# Altium PCB PCB1.PcbDoc (part 1 of 2)
Units mm, origin at the board's own origin, x right, y up, seen from the top; angles counter-clockwise.
Board outline 127.5 x 103 mm, 2 copper layers (Top Layer, Bottom Layer); 113 components, 82 nets, 373 pads, 162 vias.
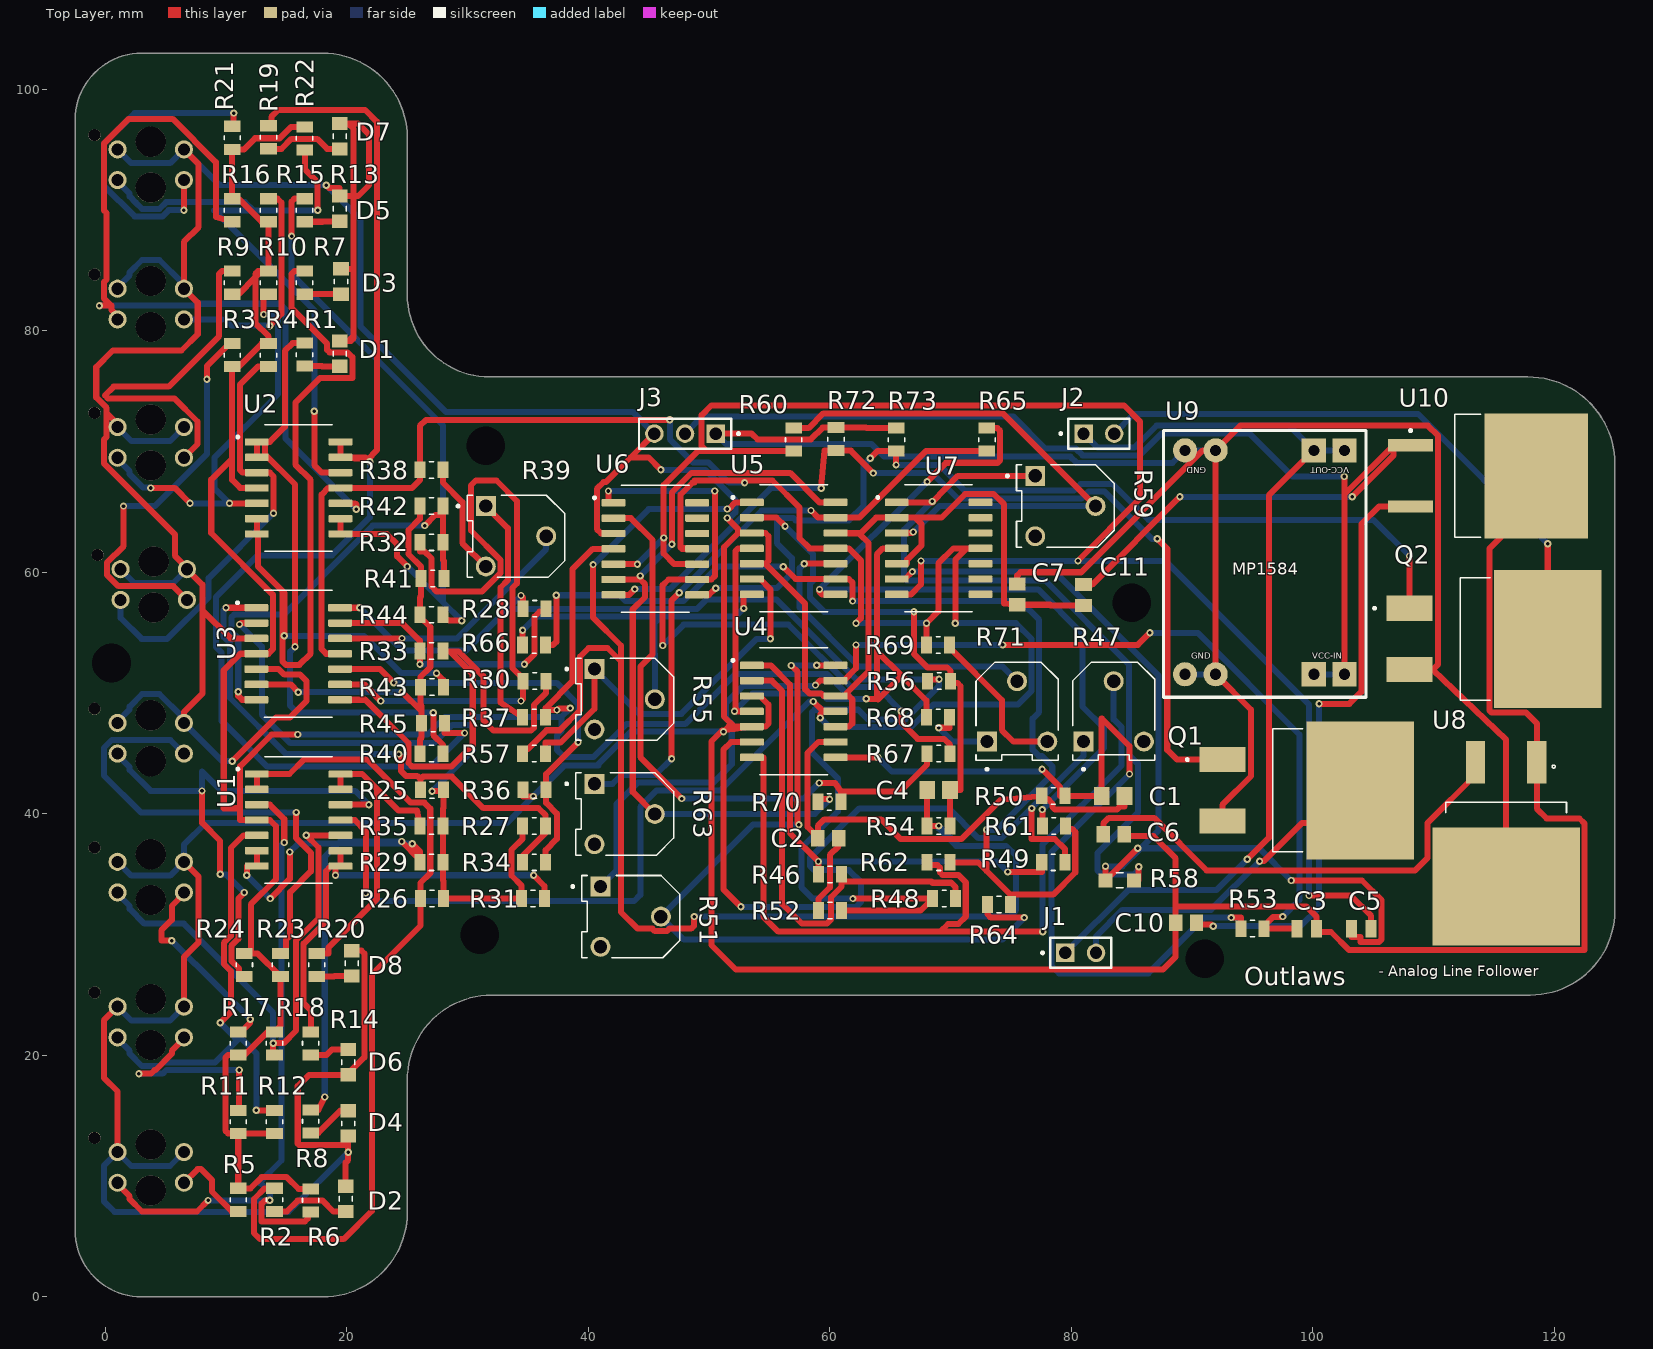
[diagram p0: Top Layer view]
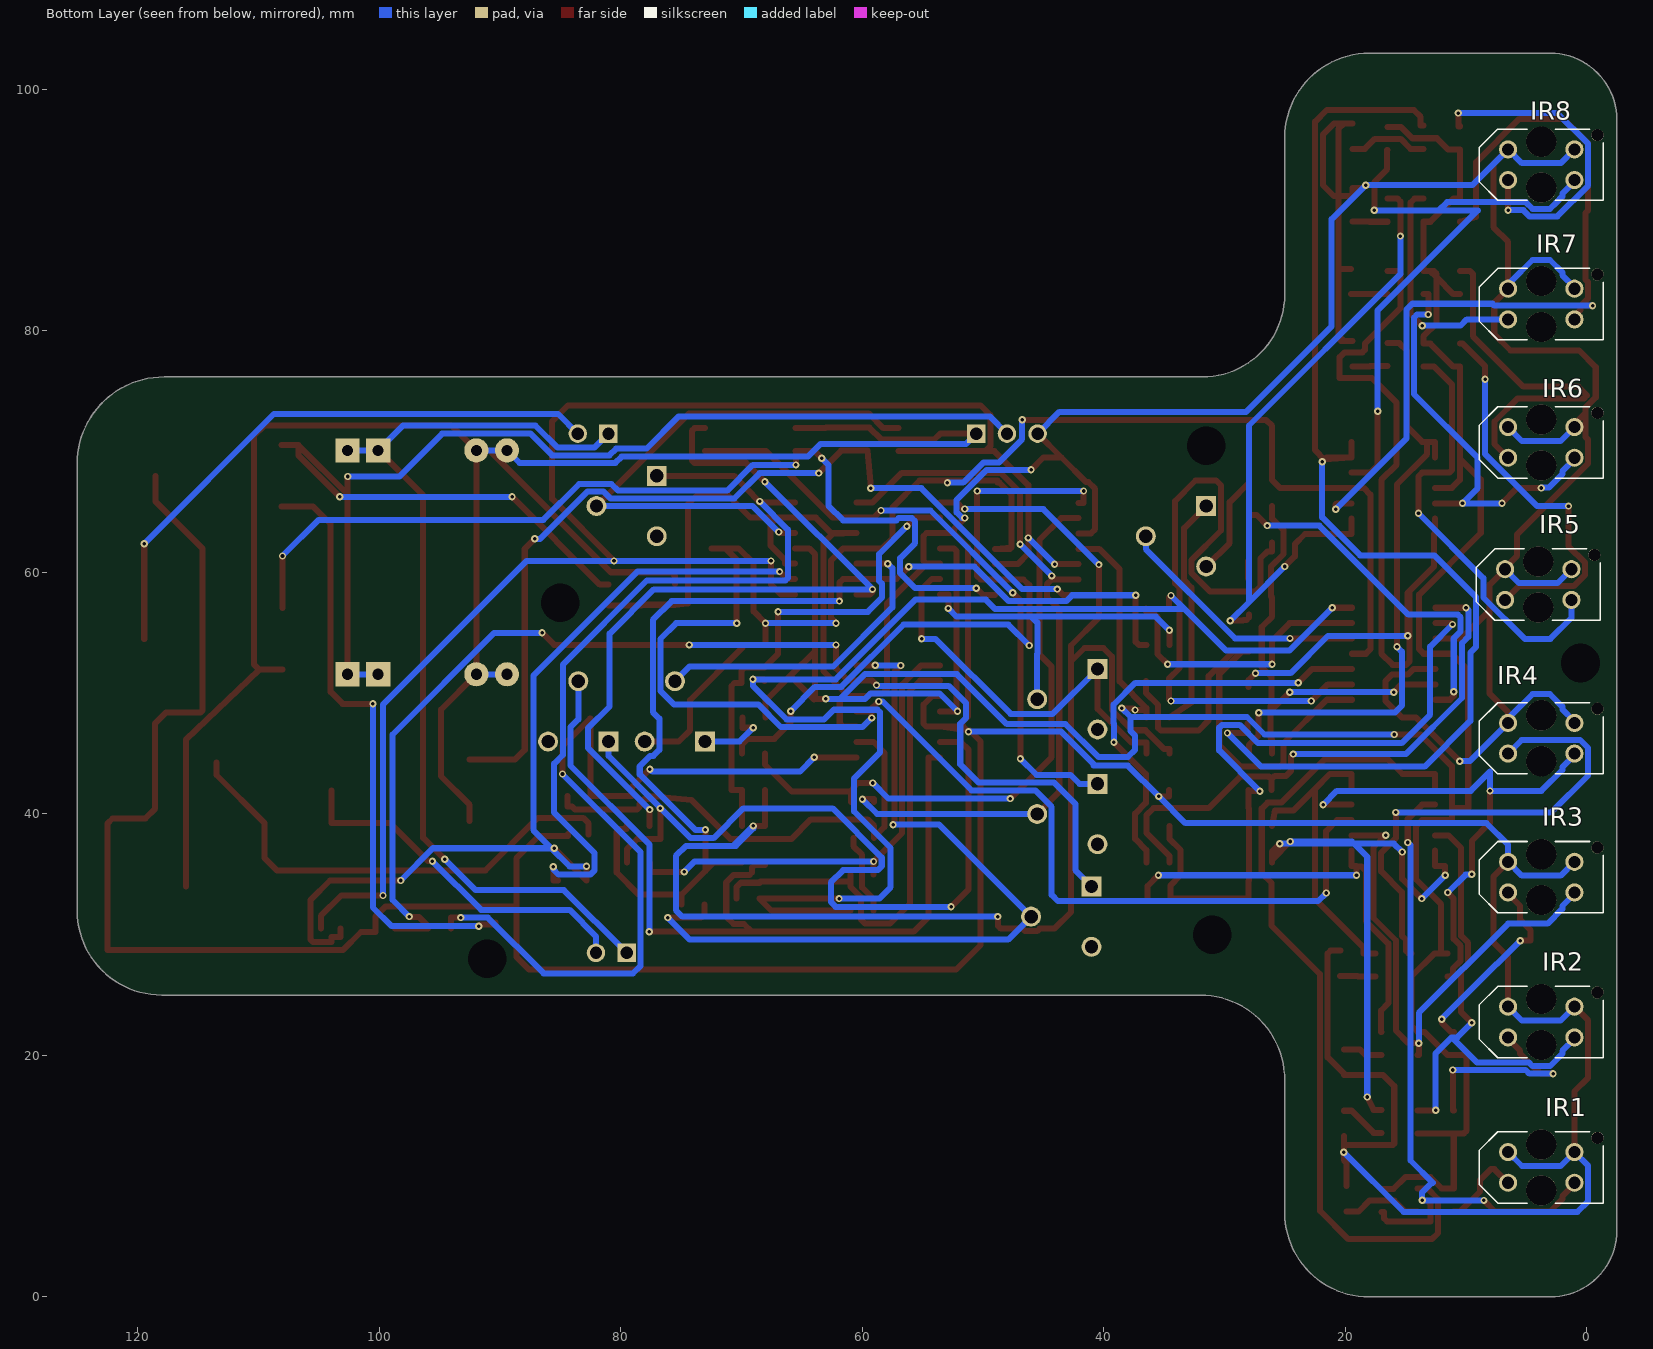
[diagram p1: Bottom Layer view, seen from below]
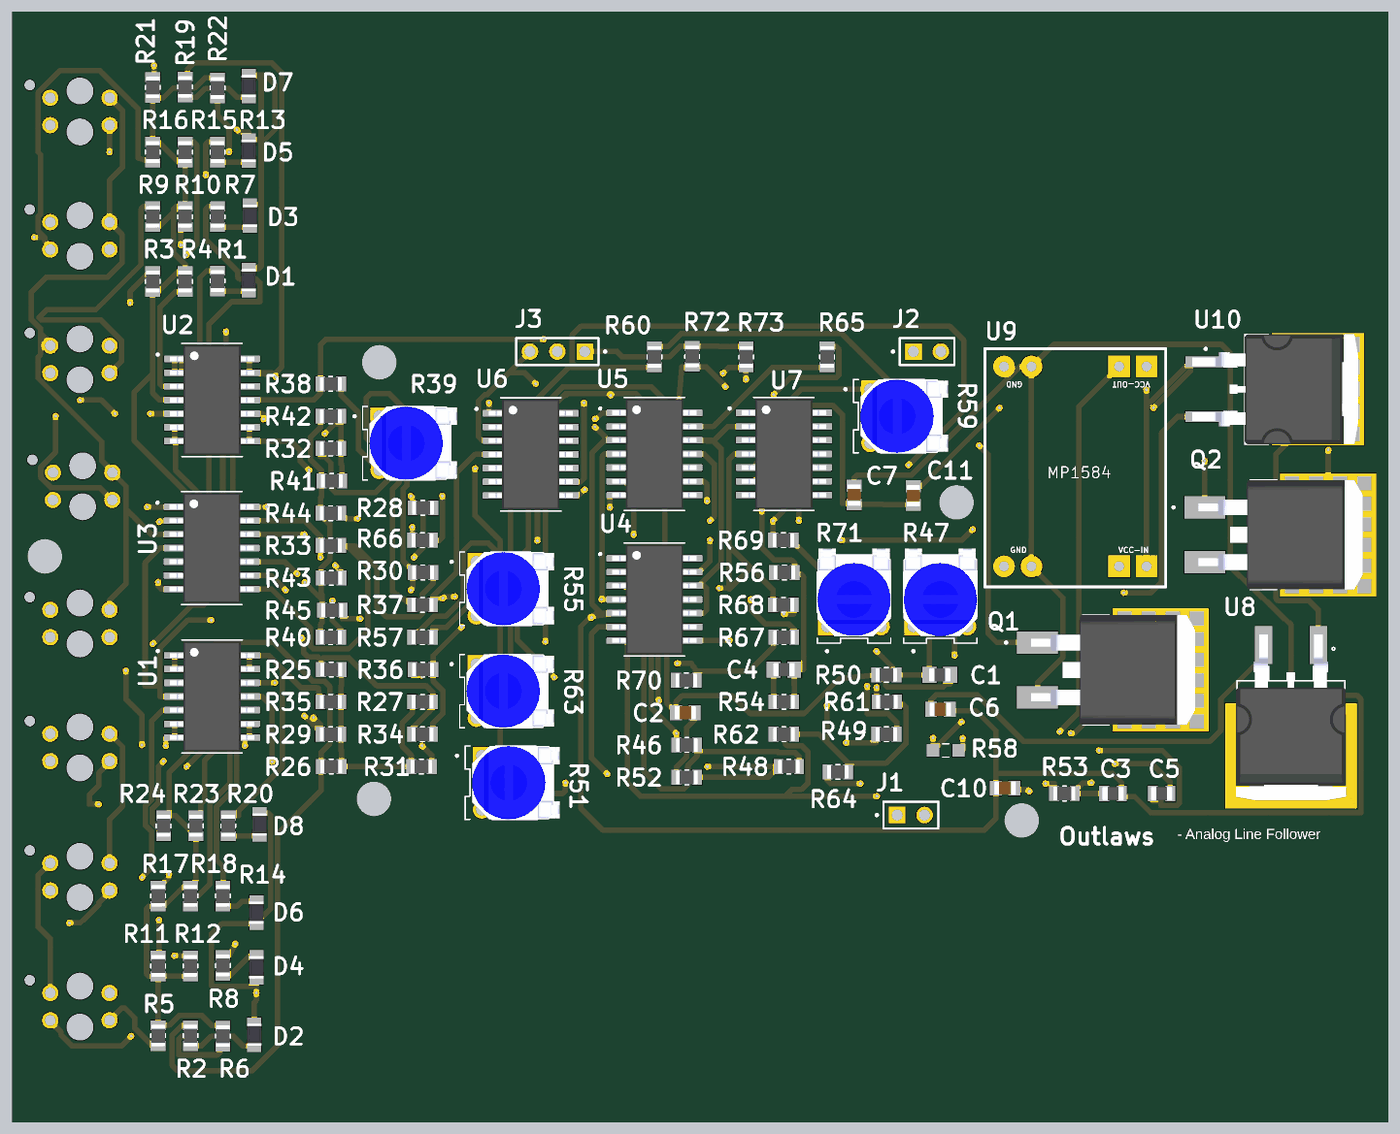
[diagram p3: 3D render of the assembled board from above, using the file's embedded part models]

## Layer stack, top to bottom
Top Solder: solder mask 0.0102, Solder Resist, Dk 3.5
Top Layer: signal copper 0.0356
Dielectric 1: dielectric 0.32, FR-4, Dk 4.8
Bottom Layer: signal copper 0.0356
Bottom Solder: solder mask 0.0102, Solder Resist, Dk 3.5

## Board outline
3,0 18,0 ccw(c18,7) 25,7 25,18 cw(c32,18) 32,25 76.2,25 118,25 ccw(c118,32) 125,32 125,69 ccw(c117.8,69) 117.8,76.2 76.2,76.2 31.8,76.2 cw(c31.8,83) 25,83 25,96 ccw(c18,96) 18,103 12,103 3,103 ccw(c3,97.5) -2.5,97.5 -2.5,5.5 ccw(c3,5.5)

## Design rules (kind name [scope] priority, off if disabled: settings)
BoardOutlineClearance [All] p1: gap=0.2 ignorepadtopadclearanceinfootprint=FALSE
Clearance [All] p1: gap=0.127 ignorepadtopadclearanceinfootprint=FALSE except(0.25: Arc-Hole Track-Hole SMDPad-Hole THPad-Hole Via-Hole Fill-Hole Poly-Hole Region-Hole Text-Hole)
ComponentClearance [All] p1: gap=0.127 collisioncheckmode=3 verticalgap=0.127 showdistances=TRUE
DiffPairsRouting [All] p1: maxlimit=0.254 minlimit=0.127 mostfreqgap=0.127 toplayer_minwidth=0.127 toplayer_maxwidth=25.4 toplayer_prefwidth=0.127 bottomlayer_minwidth=0.127 bottomlayer_maxwidth=25.4 bottomlayer_prefwidth=0.127 maxuncoupledlength=12.7
Height [All] p1: minheight=0 maxheight=1816.048 prefheight=12.7
HoleSize [All] p1: absolutevalues=TRUE maxlimit=6.3 minlimit=0.3 maxpercent=80.000 minpercent=20.000
HoleToHoleClearance [All] p1: gap=0.25 allowstackedmicrovias=FALSE
MinimumAnnularRing [All] p1: minimumring=0.076
MinimumSolderMaskSliver [All] p1: minsoldermaskwidth=0
PlaneClearance [All] p1: clearance=0.127
PlaneConnect PlaneConnectPowerPads [InPadClass('PowerPads')] p1: planeconnectstyle=Direct reliefexpansion=0.508 reliefentries=4 reliefconductorwidth=0.254 reliefairgap=0.254
PlaneConnect [All] p2: pad.planeconnectstyle=Relief pad.reliefexpansion=0.3 pad.reliefentries=4 pad.reliefconductorwidth=0.127 pad.reliefairgap=0.127 via.planeconnectstyle=Direct via.reliefexpansion=0.3 via.reliefentries=4 via.reliefconductorwidth=0.127 via.reliefairgap=0.127
PolygonConnect PolygonConnectPowerPads [All vs (InPadClass('PowerPads'))] p1: connectstyle=Direct reliefconductorwidth=0.254 reliefentries=4 polygonreliefangle="90 Angle" airgapwidth=0.254
PolygonConnect [All] p2: thpad.connectstyle=Relief thpad.reliefconductorwidth=0.127 thpad.reliefentries=4 thpad.polygonreliefangle="90 Angle" thpad.airgapwidth=0.127 smdpad.connectstyle=Relief smdpad.reliefconductorwidth=0.127 smdpad.reliefentries=4 smdpad.polygonreliefangle="90 Angle" smdpad.airgapwidth=0.127 via.connectstyle=Direct via.reliefconductorwidth=0.127 via.reliefentries=4 via.polygonreliefangle="90 Angle" via.airgapwidth=0.127
RoutingVias [All] p1: holewidth=0.3 width=0.6 viastyle="Through Hole" minholewidth=0.3 minwidth=0.6 maxholewidth=0.6 maxwidth=6.6
SilkToSilkClearance [All] p1: silktosilkclearance=0
SilkToSolderMaskClearance [IsPad] p1: minsilkscreentomaskgap=0.127 clearancetoexposedcopper=TRUE
SolderMaskExpansion [All] p1: expansion=0.075 istentingtop=FALSE
SupplyNets "Schematic Supply Nets_2" [InNet('+5')] p1: voltage=0.000
SupplyNets "Schematic Supply Nets_1" [InNet('-5')] p2: voltage=0.000
SupplyNets "Schematic Supply Nets" [InNet('GND')] p3: voltage=0.000
Width [All] p1: maxlimit=25.4 minlimit=0.127 preferedwidth=0.5 minimp=50.000000 maximp=50.000000 favimp=50.000000
20 further rules are at their usual default settings.

## Classes and differential pairs
component class Triangular_Wave: C5 R58 R59 U7
component class Regulators: C6 C7 C10 C11 J3 U8 U9 U10
component class PID: C1 C2 C3 C4 R46 R47 R48 R49 R50 R51 R52 R53 R54 R55 R56 R57 U4 U5
component class Motor_Driver: J1 J2 Q1 Q2 R61 R62 R63 R64 R65 R66 R67 R68 R69 R70 R71 R72 R73 U6
component class Input: D1 D2 D3 D4 D5 D6 D7 D8 IR1 IR2 IR3 IR4 IR5 IR6 IR7 IR8 R1 R2 R3 R4 R5 R6 R7 R8 R9 R10 R11 R12 R13 R14 R15 R16 R17 R18 R19 R20 R21 R22 R23 R24 U1 U2
component class Error_Generator: R25 R26 R27 R28 R29 R30 R31 R32 R33 R34 R35 R36 R37 R38 R39 R40 R41 R42 R43 R44 R45 U3

## Components (designator, comment, footprint, x,y, rotation, side; value= is the part's Value field where it differs from the comment)
C1 "1nF" CAPC2012X70 83.45,41.5 r180 top
C2 "1uF" CAPC2012X135N 59.863,38 r0 top
C3 "10nF" CAPC2013X110N 99.5,30.5 r180 top
C4 "100nF" CAPC2012X70 69,42 r180 top
C5 "10nF" CAPC2013X110N 104,30.5 r0 top
C6 "10uF" CAPC2012X135N 83.5,38.32 r0 top
C7 "1uF" CAPC2012X135N 75.5,58.19 r90 top
C10 "10uF" CAPC2012X135N 89.5,31 r0 top
C11 "1uF" CAPC2012X135N 81,58.137 r90 top
D1 "150080RS75000" 150080RS75000 19.5,78 r90 top
D2 "150080RS75000" 150080RS75000 20,8 r90 top
D3 "150080RS75000" 150080RS75000 19.602,83.968 r90 top
D4 "150080RS75000" 150080RS75000 20,14.5 r270 top
D5 "150080RS75000" 150080RS75000 19.5,90 r90 top
D6 "150080RS75000" 150080RS75000 20,19.577 r270 top
D7 "150080RS75000" 150080RS75000 19.5,96 r90 top
D8 "150080RS75000" 150080RS75000 20.5,27.5 r90 top
IR1 "IR" OPTO_TCRT5000 3.75,10.73 r0 bottom
IR2 "IR" OPTO_TCRT5000 3.75,22.77 r0 bottom
IR3 "IR" OPTO_TCRT5000 3.75,34.77 r0 bottom
IR4 "IR" OPTO_TCRT5000 3.75,46.27 r0 bottom
IR5 "IR" OPTO_TCRT5000 4,59 r0 bottom
IR6 "IR" OPTO_TCRT5000 3.75,70.77 r0 bottom
IR7 "IR" OPTO_TCRT5000 3.75,82.23 r0 bottom
IR8 "IR" OPTO_TCRT5000 3.75,93.77 r0 bottom
J1 "HTSW-102-08-TM-S" SAMTEC_HTSW-102-08-TM-S 80.77,28.5 r180 top
J2 "HTSW-102-08-TM-S" SAMTEC_HTSW-102-08-TM-S 82.27,71.5 r180 top
J3 "External Power Connector" SAMTEC_HTSW-103-XX-X-S 48,71.5 r0 top
Q1 "IRF540NSTRLPBF" TRANS_IRF540NSTRLPBF 99.485,41.96 r0 top
Q2 "IRF540NSTRLPBF" TRANS_IRF540NSTRLPBF 115,54.5 r0 top
R1 "1k" RESC2012X60N#1 16.5,78.045 r90 top
R2 "1k" RESC2012X60N#1 14,8.045 r90 top
R3 "150 ohm" RESC2012X60N#1 10.5,78 r90 top
R4 "10k" RESC2012X60N#1 13.5,78 r90 top
R5 "150 ohm" RESC2012X60N#1 11,8.045 r270 top
R6 "10k" RESC2012X60N#1 17,8 r90 top
R7 "1k" RESC2012X60N#1 16.5,84 r90 top
R8 "1k" RESC2012X60N#1 17,14.545 r90 top
R9 "150 ohm" RESC2012X60N#1 10.5,84 r90 top
R10 "10k" RESC2012X60N#1 13.5,84 r90 top
R11 "150 ohm" RESC2012X60N#1 11,14.5 r90 top
R12 "10k" RESC2012X60N#1 14,14.5 r270 top
R13 "1k" RESC2012X60N#1 16.5,90 r90 top
R14 "1k" RESC2012X60N#1 17,21 r90 top
R15 "150 ohm" RESC2012X60N#1 13.5,90 r90 top
R16 "10k" RESC2012X60N#1 10.5,90 r90 top
R17 "150 ohm" RESC2012X60N#1 11,21 r90 top
R18 "10k" RESC2012X60N#1 14,21 r90 top
R19 "1k" RESC2012X60N#1 13.5,96.045 r90 top
R20 "1k" RESC2012X60N#1 17.5,27.5 r90 top
R21 "150 ohm" RESC2012X60N#1 10.5,96 r90 top
R22 "10k" RESC2012X60N#1 16.5,95.95 r90 top
R23 "150 ohm" RESC2012X60N#1 14.5,27.5 r90 top
R24 "10k" RESC2012X60N#1 11.5,27.5 r90 top
R25 "1k" RESC2012X60N#1 27.045,42 r180 top
R26 "1k" RESC2012X60N#1 27.045,33 r0 top
R27 "1k" RESC2012X60N#1 35.5,39 r0 top
R28 "1k" RESC2012X60N#1 35.545,57 r180 top
R29 "2k" RESC2012X60N#1 27,36 r0 top
R30 "2k" RESC2012X60N#1 35.545,51 r0 top
R31 "4.7k" RESC2012X60N#1 35.405,33 r180 top
R32 "1.5k" RESC2012X60N#2 27,62.5 r180 top
R33 "1k" RESC2012X60N#1 27,53.5 r180 top
R34 "2k" RESC2012X60N#1 35.5,36 r0 top
R35 "10k" RESC2012X60N#1 27,39 r0 top
R36 "1.5k" RESC2012X60N#2 35.545,42 r0 top
R37 "100k" RESC2012X60N#1 35.5,48 r180 top
R38 "100k" RESC2012X60N#1 27,68.5 r180 top
R39 "Preset-10k" TRIM_3306F-1-103 34,63 r180 top
R40 "10k" RESC2012X60N#1 27,45 r180 top
R41 "1k" RESC2012X60N#1 27.095,59.5 r0 top
R42 "1k" RESC2012X60N#1 27,65.5 r0 top
R43 "4.7k" RESC2012X60N#1 27.045,50.5 r180 top
R44 "2k" RESC2012X60N#1 27,56.5 r180 top
R45 "1k" RESC2012X60N#1 27.14,47.5 r180 top
R46 "33k" RESC2012X60N#1 60,35 r180 top
R47 "Preset-10k" TRIM_3306F-1-103 83.5,48.5 r270 top
R48 "33k" RESC2012X60N#1 69.455,33 r0 top
R49 "4.7k" RESC2012X60N#1 78.5,36 r0 top
R50 "33k" RESC2012X60N#1 78.5,41.5 r0 top
R51 "Preset-10k" TRIM_3306F-1-103 43.5,31.5 r180 top
R52 "1k" RESC2012X60N#1 60,32 r180 top
R53 "4.7k" RESC2012X60N#1 95,30.5 r0 top
R54 "100k" RESC2012X60N#1 69,39 r180 top
R55 "Preset-10k" TRIM_3306F-1-103 43,49.5 r180 top
R56 "4.7k" RESC2012X60N#1 69.045,51 r0 top
R57 "4.7k" RESC2012X60N#1 35.5,45 r0 top
R58 "15k" RES_ERA6ARB153V 84,34.5 r180 top
R59 "Preset-10k" TRIM_3306F-1-103 79.5,65.5 r180 top
R60 "47k" RESC2012X60N#1 57,71 r270 top
R61 "47k" RESC2012X60N#1 78.545,39 r180 top
R62 "1k" RESC2012X60N#1 69,36 r0 top
R63 "Preset-10k" TRIM_3306F-1-103 43,40 r180 top
R64 "1k" RESC2012X60N#1 74,32.5 r0 top
R65 "10k" RESC2012X60N#1 73,71 r270 top
R66 "1k" RESC2012X60N#1 35.5,54 r0 top
R67 "47k" RESC2012X60N#1 69,45 r0 top
R68 "100k" RESC2012X60N#1 68.955,48 r0 top
R69 "100k" RESC2012X60N#1 68.955,54 r180 top
R70 "47k" RESC2012X60N#1 59.955,41 r0 top
R71 "Preset-10k" TRIM_3306F-1-103 75.5,48.5 r270 top
R72 "10k" RESC2012X60N#1 60.5,71.045 r90 top
R73 "10k" RESC2012X60N#1 65.5,71 r90 top
U1 "LM324NS" SOIC127P780X200-14N 16,39.5 r0 top
U2 "LM324NS" SOIC127P780X200-14N 16,67 r0 top
U3 "LM324NS" SOIC127P780X200-14N 15.965,53.27 r0 top
U4 "LM324NS" SOIC127P780X200-14N 57,48.5 r0 top
U5 "LM324NS" SOIC127P780X200-14N 57,62 r0 top
U6 "LM324NS" SOIC127P780X200-14N 45.535,61.96 r0 top
U7 "LM324NS" SOIC127P780X200-14N 69,62 r0 top
U8 "-5 regulator" VREG_L7805ACD2T 116,37.575 r270 top
U9 "MP1584" MP1584 95.5,63 r0 top
U10 "+5 regulator" TO254P1542X460-3N 114.5,68 r0 top

## Footprints (in the part's own frame and the unit in brackets; to place one, negate y for a bottom-side part, rotate by r counter-clockwise, add the part's x,y. Pads: shape width x height; smd on the part's side, far side on the other; paste and mask are expansions set on the pad)
150080RS75000 [mm]
  rect 1.1x1.3 smd: 1(-0.923,0.102) 2(1.177,0.102)
  silkscreen extent -0.07,-0.45 0.33,0.65, body extent -0.92,-0.57 1.18,0.78, height 0.8
CAPC2012X70 [mm]
  rect 1.3x1.5 smd paste+0 mask+0.102: 1(-0.95,0) 2(0.95,0)
  body extent -1,-0.63 1,0.63, height 0.7
CAPC2012X135N [mm]
  rect 1.1x1.38 smd: 1(-0.863,0) 2(0.863,0)
  body extent -1,-0.63 1,0.63, height 1.4
CAPC2013X110N [mil]
  rect 36x57 smd: 1(-32,0) 2(32,0)
  body extent -39,-25 39,25, height 28
MP1584 [mil]
  round 78.74 hole 36 paste-99999 mask+2: GNDin(-240,-450) GNDout(-240,280)
  round 78.74 hole 36 paste-99999 mask+4: GNDin(-140,-450) GNDout(-140,280)
  rect 78.74x78.74 hole 36 paste-99999 mask+4: Vin(180,-450) Vout(180,280)
  rect 78.74x78.74 hole 36 paste-99999 mask+2: Vin(280,-450) Vout(280,280)
  silkscreen extent -310,-525 350,345
OPTO_TCRT5000 [mm]
  round 1.5 hole 1: A(2.75,1.27) CATH(2.75,-1.27) COLL(-2.75,1.27) E(-2.75,-1.27)
  round 1 hole 1 unplated: ""(-4.65,-2.45)
  round 2.5 hole 2.5 unplated: ""(0,-1.9) ""(0,1.9)
  silkscreen extent -5.15,-2.95 5.15,2.95
RES_ERA6ARB153V [mm]
  rect 1.15x1.15 smd: 1(-1.175,0) 2(1.175,0)
  silkscreen extent -0.28,-0.62 0.28,0.63
RESC2012X60N#1 [mm]
  rect 0.92x1.38 smd: 1(-0.955,0) 2(0.955,0)
  silkscreen extent -0.17,-0.68 0.17,0.68, body extent -1,-0.63 1,0.63, height 0.6
RESC2012X60N#2 [mm]
  rect 0.92x1.38 smd paste+0 mask+0.102: 1(-0.955,0) 2(0.955,0)
  silkscreen extent -0.17,-0.68 0.17,0.68, body extent -1,-0.63 1,0.63, height 0.6
SAMTEC_HTSW-102-08-TM-S [mm]
  rect 1.53x1.53 hole 1.02: 01(1.27,0)
  round 1.53 hole 1.02: 02(-1.27,0)
  silkscreen extent -2.54,-1.24 3.26,1.24
SAMTEC_HTSW-103-XX-X-S [mm]
  rect 1.53x1.53 / inner round 1.53 / far side rect 1.53x1.53 hole 1.02: 01(2.54,0)
  round 1.53 hole 1.02: 02(0,0) 03(-2.54,0)
  silkscreen extent -3.81,-1.24 4.53,1.24
SOIC127P780X200-14N [mm]
  rrect25% 1.97x0.61 smd: 1(-3.465,3.81) 2(-3.465,2.54) 3(-3.465,1.27) 4(-3.465,0) 5(-3.465,-1.27) 6(-3.465,-2.54) 7(-3.465,-3.81) 8(3.465,-3.81) 9(3.465,-2.54) 10(3.465,-1.27) 11(3.465,0) 12(3.465,1.27) 13(3.465,2.54) 14(3.465,3.81)
  silkscreen extent -5.13,-5.25 2.8,5.25, body extent -3.9,-5.1 3.9,5.1, height 2
TO254P1542X460-3N [mm]
  rect 3.74x1.02 smd: 1(-6.41,2.54) 2(-6.41,-2.54)
  rect 8.56x10.37 smd paste-6: 3(4,0)
  silkscreen extent -6.51,-5.1 -0.59,5.1, body extent -7.71,-5.1 7.71,5.1, height 4.6
TRANS_IRF540NSTRLPBF [mm]
  rect 3.81x2.08 smd: 1(-6.985,2.54) 3(-6.985,-2.54)
  rect 8.89x11.43 smd paste-7: 2(4.445,0)
  silkscreen extent -9.99,-5.08 -0.32,5.08, body extent -7.62,-5.08 7.62,5.08, height 4.83
TRIM_3306F-1-103 [mm]
  rect 1.65x1.65 / inner round 1.65 / far side rect 1.65x1.65 hole 1.1: 1(2.5,-2.5)
  round 1.65 hole 1.1: 2(-2.5,0) 3(2.5,2.5)
  silkscreen extent -4.05,-3.41 4.9,3.4, body extent -4.7,-3.4 3.4,3.4, height 8.38
VREG_L7805ACD2T [mm]
  rect 3.5x1.6 smd: 1(-6.7,2.54) 3(-6.7,-2.54)
  rect 9.75x12.2 smd paste-7: 4(3.575,0)
  silkscreen extent -6.48,-5 -2.51,5, body extent -7.71,-5.1 7.71,5.1, height 4.6

## Part data
C1: "1000 pF Â±10% 50V Ceramic Capacitor X7R 0805 (2012 Metric); CC0805KRX7R9BB102", Package="0805 Yageo", Check_prices=https://www.snapeda.com/parts/CC0805KRX7R9BB102/Yageo/view-part/?ref=eda, MF=Yageo, MP=CC0805KRX7R9BB102, SnapEDA_Link=https://www.snapeda.com/parts/CC0805KRX7R9BB102/Yageo/view-part/?ref=snap
C2 C7 C11: "SMD Capacitor X7R(EIA) with Capacitance: 1.0uF Tol. 10%. Rated Voltage: 25Vdc; GRM21BR71E105KA99L", Package="2012 Murata", Check_prices=https://www.snapeda.com/parts/GRM21BR71E105KA99L/Murata/view-part/?ref=eda, MF=Murata, MP=GRM21BR71E105KA99L, SnapEDA_Link=https://www.snapeda.com/parts/GRM21BR71E105KA99L/Murata/view-part/?ref=snap
C3 C5: "10000 pF Â±10% 50V Ceramic Capacitor X7R 0805 (2012 Metric); CC0805KRX7R9BB103", Package="0805 Yageo", Check_prices=https://www.snapeda.com/parts/CC0805KRX7R9BB103/Yageo/view-part/?ref=eda, MF=Yageo, MP=CC0805KRX7R9BB103, SnapEDA_Link=https://www.snapeda.com/parts/CC0805KRX7R9BB103/Yageo/view-part/?ref=snap
C4: library part 1nF, "1000 pF Â±10% 50V Ceramic Capacitor X7R 0805 (2012 Metric); CC0805KRX7R9BB102", Package="0805 Yageo", Check_prices=https://www.snapeda.com/parts/CC0805KRX7R9BB102/Yageo/view-part/?ref=eda, MF=Yageo, MP=CC0805KRX7R9BB102, SnapEDA_Link=https://www.snapeda.com/parts/CC0805KRX7R9BB102/Yageo/view-part/?ref=snap
C6 C10: library part 1uF, "SMD Capacitor X7R(EIA) with Capacitance: 1.0uF Tol. 10%. Rated Voltage: 25Vdc; GRM21BR71E105KA99L", Package="2012 Murata", Check_prices=https://www.snapeda.com/parts/GRM21BR71E105KA99L/Murata/view-part/?ref=eda, MF=Murata, MP=GRM21BR71E105KA99L, SnapEDA_Link=https://www.snapeda.com/parts/GRM21BR71E105KA99L/Murata/view-part/?ref=snap
IR1 IR2 IR3 IR4 IR5 IR6 IR7 IR8: "950 nm 60 mA Through Hole Reflective Optical Sensor with Transistor Output; TCRT5000", Package=None, Availability=Unavailable, MP=TCRT5000, Price=None
J1 J2: "HEADER, 2 CONTACTS, 1 ROW, THROUGH HOLE, 2.54 MM; Connector Systems:Board-to-Board; Pitch Spacing:2.54mm; No. of Rows:1Rows; No. of Contacts:2Contacts; Contact Termination Type:Through Hole; Product Range:HTSW Series; Gender:Header RoHS Compliant: Yes", Package=None, Availability="In Stock", Check_prices=https://www.snapeda.com/parts/HTSW10208TMS/Samtec/view-part/?ref=eda, MF=Samtec, MP=HTSW10208TMS, Price=None, SnapEDA_Link=https://www.snapeda.com/parts/HTSW10208TMS/Samtec/view-part/?ref=snap
J3: library part HTSW-103-XX-X-S, "HTSW-103-XX-X-S", Package=None, Availability=Unavailable, MF=Samtec, MP=HTSW-103-XX-X-S, Price=None
Q1 Q2: "MOSFET, Power,N-Ch,VDSS 100V,RDS(ON) 44 Milliohms,ID 33A,D2Pak,PD 130W,VGS+/-20V", Package="D2PAK Infineon", Check_prices=https://www.snapeda.com/parts/IRF540NSTRLPBF/Infineon/view-part/?ref=eda, MF=Infineon, MP=IRF540NSTRLPBF, SnapEDA_Link=https://www.snapeda.com/parts/IRF540NSTRLPBF/Infineon/view-part/?ref=snap
R1 R2 R7 R8 R13 R14 R19 R20 R25 R26 R27 R28 R33 R41 R42 R45 R52 R62 R64 R66: "1 kOhms Â±1% 0.125W, 1/8W Chip Resistor 0805 (2012 Metric) Moisture Resistant Thick Film; RC0805FR-071KL", Package="2012 Yageo", Check_prices=https://www.snapeda.com/parts/RC0805FR-071KL/Yageo/view-part/?ref=eda, DigiKey_Part_Number=311-1.00KCRTR-ND, MF=Yageo, MP=RC0805FR-071KL, Purchase-URL=https://pricing.snapeda.com/search?q=RC0805FR-071KL&ref=eda, SnapEDA_Link=https://www.snapeda.com/parts/RC0805FR-071KL/Yageo/view-part/?ref=snap
R3 R5 R9 R11 R15 R17 R21 R23: "150 Ohms Â±1% 0.125W, 1/8W Chip Resistor 0805 (2012 Metric) Moisture Resistant Thick Film; RC0805FR-07150RL", Package="2012 Yageo", Check_prices=https://www.snapeda.com/parts/RC0805FR-07150RL/Yageo/view-part/?ref=eda, MF=Yageo, MP=RC0805FR-07150RL, SnapEDA_Link=https://www.snapeda.com/parts/RC0805FR-07150RL/Yageo/view-part/?ref=snap
R4 R6 R10 R12 R16 R18 R22 R24 R35 R40 R65 R72 R73: "10 kOhms Â±1% 0.125W, 1/8W Chip Resistor 0805 (2012 Metric) Moisture Resistant Thick Film; RC0805FR-0710KL", Package="2012 Rohm Semiconductor", Availability="In Stock", Check_prices=https://www.snapeda.com/parts/RC0805FR-0710KL/Yageo/view-part/?ref=eda, MF=Yageo, MP=RC0805FR-0710KL, Price=None, Purchase-URL=https://pricing.snapeda.com/search/part/RC0805FR-0710KL/?ref=eda, SnapEDA_Link=https://www.snapeda.com/parts/RC0805FR-0710KL/Yageo/view-part/?ref=snap
R29 R30 R34 R44: "2 kOhms Â±1% 0.125W, 1/8W Chip Resistor 0805 (2012 Metric) Moisture Resistant Thick Film; RC0805FR-072KL", Package="2012 Yageo", Check_prices=https://www.snapeda.com/parts/RC0805FR-072KL/Yageo/view-part/?ref=eda, MF=Yageo, MP=RC0805FR-072KL, SnapEDA_Link=https://www.snapeda.com/parts/RC0805FR-072KL/Yageo/view-part/?ref=snap
R31 R43 R49 R53 R56 R57: "4.7 kOhms Â±1% 0.125W, 1/8W Chip Resistor 0805 (2012 Metric) Moisture Resistant Thick Film; RC0805FR-074K7L", Package="2012 Rohm Semiconductor", Availability="In Stock", Check_prices=https://www.snapeda.com/parts/RC0805FR-074K7L/Yageo/view-part/?ref=eda, MF=Yageo, MP=RC0805FR-074K7L, Price=None, Purchase-URL=https://pricing.snapeda.com/search/part/RC0805FR-074K7L/?ref=eda, SnapEDA_Link=https://www.snapeda.com/parts/RC0805FR-074K7L/Yageo/view-part/?ref=snap
R32 R36: "Res Thin Film 0805 1.5K Ohm 0.1% 0.125W(1/8W) Â±25ppm/C Epoxy Pad SMD T/R; RT0805BRD071K5L", Package="2012 Yageo", Check_prices=https://www.snapeda.com/parts/RT0805BRD071K5L/Yageo/view-part/?ref=eda, MF=Yageo, MP=RT0805BRD071K5L, SnapEDA_Link=https://www.snapeda.com/parts/RT0805BRD071K5L/Yageo/view-part/?ref=snap
R37 R38 R54 R68 R69: "100 kOhms Â±1% 0.125W, 1/8W Chip Resistor 0805 (2012 Metric) Moisture Resistant Thick Film; RC0805FR-07100KL", Package="2012 Yageo", Check_prices=https://www.snapeda.com/parts/RC0805FR-07100KL/Yageo/view-part/?ref=eda, MF=Yageo, MP=RC0805FR-07100KL, SnapEDA_Link=https://www.snapeda.com/parts/RC0805FR-07100KL/Yageo/view-part/?ref=snap
R39 R47 R51 R55 R59 R63 R71: library part Preset, "TRIMMER - 6MM ROUND, SINGLE-TURN,CERMET, 10K OHMS", Package="3306F Bourns", Check_prices=https://www.snapeda.com/parts/3306F-1-103/Bourns/view-part/?ref=eda, MF=Bourns, MP=3306F-1-103, SnapEDA_Link=https://www.snapeda.com/parts/3306F-1-103/Bourns/view-part/?ref=snap
R46 R48 R50: "33 kOhms Â±1% 0.125W, 1/8W Chip Resistor 0805 (2012 Metric) Moisture Resistant Thick Film; RC0805FR-0733KL", Package="2012 Yageo", Check_prices=https://www.snapeda.com/parts/RC0805FR-0733KL/Yageo/view-part/?ref=eda, MF=Yageo, MP=RC0805FR-0733KL, SnapEDA_Link=https://www.snapeda.com/parts/RC0805FR-0733KL/Yageo/view-part/?ref=snap
R58: "ERA6ARB153V", Package=None, Availability=Unavailable, MP=ERA6ARB153V, Price=None
R60 R61 R67 R70: "47 kOhms Â±1% 0.125W, 1/8W Chip Resistor 0805 (2012 Metric) Moisture Resistant Thick Film; RC0805FR-0747KL", Package="2012 Yageo", Check_prices=https://www.snapeda.com/parts/RC0805FR-0747KL/Yageo/view-part/?ref=eda, MF=Yageo, MP=RC0805FR-0747KL, SnapEDA_Link=https://www.snapeda.com/parts/RC0805FR-0747KL/Yageo/view-part/?ref=snap
U1 U2 U3 U4 U5 U6 U7: "4-Channel industry standard operational amplifier 14-SO 0 to 70; LM324NSRG4", Package="SOP-14 Texas Instruments", Availability="In Stock", Check_prices=https://www.snapeda.com/parts/LM324NSRG4/Texas+Instruments/view-part/?ref=eda, MF="Texas Instruments", MP=LM324NSRG4, Price=None, Purchase-URL=https://pricing.snapeda.com/search/part/LM324NSRG4/?ref=eda, SnapEDA_Link=https://www.snapeda.com/parts/LM324NSRG4/Texas+Instruments/view-part/?ref=snap
U8: "Linear Voltage Regulator IC Negative Fixed 1 Output 1.5A D2PAK; L7905CD2T-TR", Package="TO-263-3 STMicroelectronics", Check_prices=https://www.snapeda.com/parts/L7905CD2T-TR/STMicroelectronics/view-part/?ref=eda, MF=STMicroelectronics, MP=L7905CD2T-TR, SnapEDA_Link=https://www.snapeda.com/parts/L7905CD2T-TR/STMicroelectronics/view-part/?ref=snap
U10: "Linear Voltage Regulator IC Positive Fixed 1 Output 1.5A D2PAK; L7805CD2T-TR", Package="TO-263-3 STMicroelectronics", Check_prices=https://www.snapeda.com/parts/L7805CD2T-TR/STMicroelectronics/view-part/?ref=eda, MF=STMicroelectronics, MP=L7805CD2T-TR, SnapEDA_Link=https://www.snapeda.com/parts/L7805CD2T-TR/STMicroelectronics/view-part/?ref=snap

## Free pads (board coordinates)
  round 1.524 hole 3.2 unplated: 2(31,30) 2(91.045,28) 3(85,57.5) 4(0.5,52.5) MH2(31.5,70.5)

## Via types
v1: diameter 0.6, hole 0.3, Top Layer to Bottom Layer, 162 vias

## Nets (pads, with @x,y where several pads share a name; then routed paths per layer and width w, separated by ;. In a path a pad name is that pad's centre, name@x,y a point inside that pad or via, vN(x,y) a via of type N, cw(c..) or ccw(c..) an arc to the next point about the centre after c; other vN are vias at no path point)
6V: J1.01 J2.01 U9.Vout | length 78.1
  Top Layer w0.5: v1(94.564,36.246) 96.342,38.024 96.342,66.382 U9.Vout@100.072,70.112
  Bottom Layer w0.5: J1.01@79.5,28.5 84.688,33.688 92.007,33.688 v1(94.564,36.246) ; J2.01@81,71.5 82.167,70.333 85.217,70.333 87.046,72.161 98.023,72.161 U9.Vout@100.072,70.112 U9.Vout@102.612,70.112
+5: C10.2 U10.2 | length 50.3
  Top Layer w0.5: C10.2@90.363,31 90.363,30.861 91.592,30.861 v1(91.745,30.709) ; v1(100.508,49.124) 103.022,49.124 104.013,50.114 104.013,64.012 105.461,65.46 U10.2@108.09,65.46
  Bottom Layer w0.5: v1(91.745,30.709) 98.958,30.709 100.508,32.258 v1(100.508,49.124)
+5V: R3.1 R4.2 R5.1 R6.2 R9.1 R10.2 R11.1 R12.2 R15.1 R16.2 R17.1 R18.2 R21.1 R22.2 R23.1 R24.2 R37.1 R68.1 U1.4 U2.4 U3.4 U4.4 U5.4 U6.4 U7.4 | length 267.8
  Top Layer w0.5: R9.1@10.5,83.045 11.024,83.045 12.421,84.442 ; R24.2@11.5,28.455 R24.2@12.04,28.455 ; U2.4@12.535,67 11.156,67 10.49,67.666 10.49,69.418 ; R12.2@14,13.545 R11.1@11,13.545 ; v1(15.926,46.584) 13.767,46.584 11.151,43.967 11.151,40.473 ; R22.2@16.5,96.905 15.371,96.905 14.427,95.961 12.395,95.961 11.479,95.045 R21.1@10.5,95.045 R16.2@10.5,90.955 11.024,90.955 12.934,89.045 R15.1@13.5,89.045 R10.2@13.5,84.955 R10.2@12.934,84.955 ; R6.2@17,8.955 15.988,8.955 15.011,9.931 12.946,9.931 12.014,9 R5.1@11,9 R11.1@11,13.545 ; R37.1@36.455,48 R37.1@36.455,48.616 ; v1(38.5,48.768) 38.481,48.749 37.549,48.749 37.416,48.616 R37.1@36.455,48.616 ; U6.4@42.07,61.96 40.361,61.96 38.671,60.27 38.671,50.984 36.455,48.768 R37.1@36.455,48.616 ; v1(52.095,48.5) 52.426,48.5 ; U4.4@53.535,48.5 52.426,48.5 ; U5.4@53.535,62 52.399,62 52.172,61.773 52.172,48.754 52.426,48.5 ; v1(63,49.539) 63.89,49.539 63.89,53.487 ; 63.966,49.463 65.941,51.437 ; U7.4@65.535,62 64.388,62 63.89,61.503 63.89,53.487 ; R68.1@68,48 68,49.378 65.941,51.437 ; 10.49,69.418 8.763,67.691 8.763,63.271 13.868,58.166 13.868,53.651 13.487,53.27 U3.4@12.5,53.27 11.176,53.27 9.797,51.891 9.797,40.473 11.151,40.473 ; 10.49,69.418 10.49,77.045 R3.1@10.5,77.045 11.024,77.045 12.934,78.955 R4.2@13.5,78.955 13.513,78.955 13.513,79.553 12.421,80.645 12.421,84.442 ; R11.1@11,13.545 10.16,13.545 9.931,13.774 9.931,19.816 10.16,20.045 R17.1@11,20.045 11.532,20.045 13.442,21.955 R18.2@14,21.955 14.5,22.455 R23.1@14.5,26.545 14.496,26.545 12.586,28.455 R24.2@12.04,28.455 ; 11.151,40.473 11.151,39.5 U1.4@12.535,39.5 13.614,39.5 14.122,38.992 14.122,34.595 12.04,32.512 R24.2@12.04,28.455 ; 12.421,84.442 12.421,84.734 12.641,84.955 R10.2@12.934,84.955 ; 12.421,84.442 R10.2@12.934,84.955 ; 63.89,53.487 65.941,51.437
  Bottom Layer w0.5: v1(15.926,46.584) 26.67,46.584 28.118,48.031 37.763,48.031 ; v1(38.5,48.768) 37.763,48.031 ; v1(52.095,48.5) 53.585,49.99 59.295,49.99 59.746,49.539 61.817,49.539 ; v1(63,49.539) 61.817,49.539 ; 37.763,48.031 37.763,46.86 37.389,46.485 37.389,45.314 37.973,44.729 40.437,44.729 43.155,47.447 48.006,47.447 52.146,51.587 59.768,51.587 61.817,49.539
  other v1: 37.389,48.616
+7.4V: C11.2 J3.02 U9.Vin U10.1 | length 115.8
  Top Layer w0.5: C11.2@81,59 81.714,59 v1(88.982,66.269) ; v1(102.591,67.945) 102.612,67.924 102.612,66.468 ; U9.Vin@102.612,51.57 102.612,66.468 ; v1(103.251,66.269) 106.68,69.698 U10.1@106.684,70.54 ; U10.1@108.09,70.54 U10.1@106.684,70.54 ; 102.612,66.468 U10.1@106.684,70.54
  Bottom Layer w0.5: J3.02@48,71.5 49.423,72.923 75.184,72.923 77.851,70.256 80.374,70.256 80.924,69.706 85.657,69.706 87.452,71.501 94.767,71.501 98.323,67.945 v1(102.591,67.945) ; v1(88.982,66.269) v1(103.251,66.269) ; U9.Vin@100.072,51.57 U9.Vin@102.612,51.57
-5: C6.1 U8.3 | length 39.7
  Top Layer w0.5: C6.1@82.637,38.32 82.637,39.218 83.094,39.675 86.843,39.675 91.186,35.331 108.458,35.331 109.499,36.373 109.499,39.268 113.46,43.229 U8.3@113.46,44.275
-5V: R38.2 R69.2 U1.11 U2.11 U3.11 U4.11 U5.11 U6.11 U7.11 | length 203.2
  Top Layer w0.5: U3.11@19.43,53.27 18.282,53.27 17.907,53.645 17.907,66.446 18.461,67 U2.11@19.465,67 25.4,67 26.045,67.645 R38.2@26.045,68.5 26.045,72.136 26.553,72.644 v1(46.736,72.644) ; U1.11@19.465,39.5 20.65,39.5 21.565,38.586 v1(21.565,33.452) ; v1(52.934,67.437) v1@52.934,67.616 ; v1(58.618,49.313) 59.431,48.5 ; v1(59.207,47.955) 59.207,48.277 59.431,48.5 ; U4.11@60.465,48.5 59.431,48.5 ; v1(62.154,55.804) 62.56,56.21 62.56,61.009 61.57,62 U5.11@60.465,62 58.318,62 57.462,62.856 57.462,65.398 55.244,67.616 v1@52.934,67.616 ; R69.2@68,54 v1(68,55.804) 68.986,56.79 68.986,60.757 70.23,62 71.323,62 ; v1(70.383,55.804) 70.383,61.06 71.323,62 ; U7.11@72.465,62 71.323,62 ; 47.625,62.087 47.752,61.96 U6.11@49,61.96 47.625,62.087 ; 47.625,62.087 47.625,66.446 48.616,67.437 ; 48.616,67.437 48.795,67.437 48.795,67.616 ; 48.616,67.437 48.795,67.616 ; 48.795,67.616 v1@52.934,67.616
  Bottom Layer w0.5: v1(21.565,33.452) 22.225,32.791 43.79,32.791 44.298,33.3 44.298,40.593 45.657,41.952 50.934,41.952 58.295,49.313 v1(58.618,49.313) ; v1(46.736,72.644) 46.736,71.044 48.653,69.127 49.938,69.127 51.628,67.437 v1(52.934,67.437) ; v1(59.207,47.955) 59.969,47.193 66.711,47.193 68.591,49.073 75.584,49.073 76.702,50.19 76.702,54.489 75.387,55.804 v1(70.383,55.804) ; v1(62.154,55.804) v1(68,55.804)
-7.4V: C7.2 J3.01 Q1.3 Q2.3 R72.2 R73.2 U8.4 U9.GNDin U9.GNDout | length 176.9
  Top Layer w0.5: J3.01@50.54,71.5 53.519,71.5 54,71.018 58.409,71.018 59.391,72 R72.2@60.5,72 62.967,72 63.012,71.955 R73.2@65.5,71.955 ; C7.2@75.5,59.053 75.5,59.741 75.779,60.02 80.797,60.02 90.889,70.112 U9.GNDout@91.944,70.112 ; Q1.3@92.5,39.42 92.5,40.76 94.869,43.129 94.869,48.645 U9.GNDin@91.944,51.57 U9.GNDout@91.944,70.112 ; Q2.3@108.015,51.96 109.931,51.96 ; U8.4@116,34 116.002,34 116.002,46.152 109.931,51.96 ; U9.GNDout@91.944,70.112 93.993,72.161 109.525,72.161 110.363,71.323 110.363,52.392 109.931,51.96
  Bottom Layer w0.5: J3.01@50.54,71.5 51.385,70.655 63.432,70.655 64.499,69.588 79.917,69.588 80.426,69.079 88.371,69.079 U9.GNDout@89.404,70.112 U9.GNDout@91.944,70.112 ; U9.GNDin@89.404,51.57 U9.GNDin@91.944,51.57
GND: C3.1 C6.2 C7.1 C10.1 C11.1 D1.2 D2.2 D3.2 D4.2 D5.2 D6.2 D7.2 D8.2 IR1.CATH IR1.E IR2.CATH IR2.E IR3.CATH IR3.E IR4.CATH IR4.E IR5.CATH IR5.E IR6.CATH IR6.E IR7.CATH IR7.E IR8.CATH IR8.E J3.03 R36.1 U3.3 U3.5 U4.3 U4.5 U4.10 U4.12 U5.3 U5.5 U5.12 U6.3 U7.2 U7.5 U8.1 U10.3 | length 646.8
  Top Layer w0.5: IR1.E@1,12 1,17.028 -0.127,18.155 -0.127,22.913 IR2.E@1,24.04 ; IR6.E@1,72.04 1,72.311 0.1,73.211 ; IR2.CATH@6.5,24.04 6.5,28.141 7.722,29.362 7.722,34.818 IR3.CATH@6.5,36.04 ; IR4.CATH@6.5,47.54 6.5,48.435 8.026,49.962 8.026,56.877 ; IR8.CATH@6.5,95.04 7.722,93.818 7.722,88.598 6.5,87.376 IR7.CATH@6.5,83.5 7.645,82.355 7.645,79.731 6.299,78.384 0.61,78.384 -0.762,77.013 -0.762,74.496 0.1,73.634 0.1,73.211 ; v1(10.503,44.374) 14.11,47.981 15.265,47.981 16.662,49.378 16.662,51.003 16.129,51.537 14.814,51.537 14.351,52 U3.5@12.5,52 ; U3.3@12.5,54.54 10.363,54.54 8.026,56.877 ; v1(18.295,92.075) 18.524,91.846 19.398,91.846 D5.2@19.398,91.177 20.549,91.177 ; D1.2@19.398,79.177 20.117,79.177 ; D7.2@19.398,97.177 20.117,97.177 ; D3.2@19.5,85.145 20.341,85.145 20.549,84.938 ; D2.2@19.898,9.177 19.898,11.125 20.102,11.328 v1(20.102,11.989) 20.102,12.598 ; D4.2@20.102,13.323 20.102,12.598 ; D8.2@20.398,28.677 21.209,28.677 21.438,28.448 21.438,19.853 20.102,18.517 D6.2@20.102,18.4 16.866,18.4 15.926,17.46 15.926,12.7 16.027,12.598 20.102,12.598 ; R36.1@34.59,42 34.59,41.453 v1(35.433,41.453) ; U6.3@42.07,63.23 41.046,63.23 40.691,63.586 40.691,66.929 41.25,67.488 41.448,67.488 43.48,69.52 ; J3.03@45.46,71.5 43.48,69.52 ; v1(46,68.5) 44.98,69.52 43.48,69.52 ; v1(51.181,46.812) v1@51.309,46.94 ; v1(51.486,64.507) 52.399,63.594 52.399,63.27 ; U4.3@53.535,49.77 54.204,49.77 54.915,49.059 54.915,47.484 54.661,47.23 U4.5@53.535,47.23 ; U5.5@53.535,60.73 54.64,60.73 ; U4.10@60.465,47.23 61.57,47.23 61.849,47.509 61.849,49.491 61.57,49.77 U4.12@61.138,49.77 ; U7.5@65.535,60.73 66.396,60.73 66.396,61.062 67.589,62.255 67.589,64.008 67.057,64.54 ; C11.1@81,57.274 78.26,57.274 78.207,57.327 C7.1@75.5,57.327 74.422,57.429 74.422,65.634 73.558,66.497 71.196,66.497 69.239,64.54 67.057,64.54 ; C6.2@84.363,38.32 84.363,38.176 86.792,38.176 88.637,36.331 88.637,32.351 ; U10.3@118.5,68 118.5,65.871 114.605,61.976 114.605,48.59 114.808,48.387 117.653,48.387 118.54,47.5 U8.1@118.54,44.275 118.54,40.437 119.353,39.624 122.072,39.624 122.479,39.218 122.479,28.727 102.997,28.727 101.498,30.226 100.313,30.226 C3.1@100.313,30.5 100.313,31.496 99.458,32.351 88.637,32.351 ; 0.1,73.211 0.1,71.235 -0.127,71.008 -0.127,69.033 5.75,63.156 5.75,61.391 6.75,60.391 IR5.CATH@6.75,60.27 8.026,58.994 8.026,56.877 ; 20.117,79.177 20.32,79.177 20.549,79.406 20.549,79.609 ; 20.117,79.177 20.549,79.609 ; 20.117,97.177 20.93,97.177 21.844,96.263 21.844,92.091 20.93,91.177 20.549,91.177 ; 20.117,97.177 20.549,96.745 20.549,91.177 ; 20.549,79.609 20.549,84.938 ; 20.549,84.938 20.549,91.177 ; v1@51.309,46.94 52.083,47.041 U4.5@53.535,47.23 ; v1@51.309,46.94 51.167,46.922 51.083,46.911 50.19,46.018 50.19,29.134 52.222,27.102 87.579,27.102 88.637,28.16 C10.1@88.637,31 88.637,32.351 ; v1@51.309,46.94 51.599,47.23 52.059,47.23 ; 52.059,47.23 U4.5@53.535,47.23 ; 52.059,47.23 51.228,48.061 51.228,62.099 52.399,63.27 ; 52.399,63.27 U5.3@53.535,63.27 54.661,63.27 54.915,63.016 54.915,60.96 54.685,60.73 54.64,60.73 ; 54.64,60.73 57.951,57.419 57.951,50.33 58.291,49.99 59.258,49.99 59.478,49.77 U4.12@60.465,49.77 U4.12@61.138,49.77 ; U4.12@61.138,49.77 63.195,51.827 63.195,62.457 62.471,63.182 ; 62.471,63.182 62.382,63.27 U5.12@60.465,63.27 62.471,63.182 ; 62.471,63.182 63.829,64.54 U7.2@65.535,64.54 67.057,64.54
  Bottom Layer w0.5: IR2.E@1,24.04 2.155,22.885 5.345,22.885 IR2.CATH@6.5,24.04 ; IR3.E@1,36.04 2.14,34.9 5.36,34.9 IR3.CATH@6.5,36.04 6.5,37.463 8.284,39.247 33.227,39.247 v1(35.433,41.453) 37.981,44.001 40.819,44.001 40.819,44.12 43.511,46.812 v1(51.181,46.812) ; IR4.E@1,47.54 1,47.661 2,48.661 2,48.895 3.025,49.92 4.475,49.92 6.309,48.086 6.309,47.731 9.666,44.374 v1(10.503,44.374) ; IR6.E@1,72.04 2.149,70.891 5.351,70.891 IR6.CATH@6.5,72.04 ; IR7.E@1,83.5 1,83.621 2,84.621 2,84.855 3.025,85.88 4.475,85.88 6.309,84.046 6.309,83.691 IR7.CATH@6.5,83.5 ; IR8.E@1,95.04 2.136,93.904 5.364,93.904 IR8.CATH@6.5,95.04 9.465,92.075 v1(18.295,92.075) 21.107,89.263 21.107,80.393 28.196,73.304 43.656,73.304 J3.03@45.46,71.5 ; IR5.E@1.25,60.27 2.389,59.131 5.611,59.131 IR5.CATH@6.75,60.27 ; IR1.CATH@6.5,12 5.346,10.846 2.154,10.846 IR1.E@1,12 -0.127,10.873 -0.127,7.925 0.762,7.036 15.149,7.036 v1(20.102,11.989) ; v1(46,68.5) 49.678,68.5 52.163,66.016 52.163,64.972 51.717,64.526 51.505,64.526 v1(51.486,64.507)
left_s: R63.2 R70.1 U5.14 U6.6 | length 62.7
  Top Layer w0.5: U6.6@42.07,59.42 v1@44.298,59.42 ; v1(44.298,59.715) v1@44.298,59.42 ; R63.2@45.5,40 43.671,41.829 43.671,56.946 44.695,57.969 44.695,59.023 v1@44.298,59.42 ; v1(46.914,62.332) 46.914,66.622 48.535,68.243 56.698,68.243 59.131,65.81 U5.14@60.465,65.81 ; R70.1@59,41 59,41.224 v1(59.969,41.224)
  Bottom Layer w0.5: v1(44.298,59.715) v1(46.914,62.332) ; R63.2@45.5,40 58.745,40 v1(59.969,41.224)
NetC1_1: C1.1 C2.1 R50.1 U4.9 | length 40.5
  Top Layer w0.5: C2.1@59,38 C2.1@59,38.067 ; U4.9@60.465,45.96 59.041,45.96 58.141,45.06 58.141,38.926 C2.1@59,38.067 ; C1.1@84.4,41.5 84.4,40.636 84.03,40.636 83.755,40.361 78.638,40.361 78.434,40.565 78.434,40.843 78.028,41.25 77.545,41.25 R50.1@77.545,41.5 74.117,41.148 70.891,37.922 65.862,37.922 64.237,39.548 59.538,39.548 59,39.01 C2.1@59,38.067
NetC1_2: C1.2 R50.2 R53.1 U4.8 | length 73.3
  Top Layer w0.5: U4.8@60.465,44.69 v1(63.957,44.69) ; v1(77.572,43.713) 79.061,42.224 79.061,41.5 R50.2@79.455,41.5 C1.2@82.5,41.5 82.5,47.904 82.525,47.904 84.811,45.618 v1(84.811,43.307) ; v1(93.243,31.42) 94.045,31.42 R53.1@94.045,30.5
  Bottom Layer w0.5: v1(63.957,44.69) 65.137,43.51 77.368,43.51 v1(77.572,43.713) ; v1(84.811,43.307) 78.334,36.83 78.334,27.432 78.969,26.797 86.36,26.797 90.983,31.42 v1(93.243,31.42)
NetC2_2: C2.2 R52.2 | length 6.7
  Top Layer w0.5: R52.2@59.045,32 59.045,32.959 59.995,33.909 59.995,36.607 60.726,37.338 C2.2@60.726,38